# EAGLE board converter (EAGLE 7.2.0)
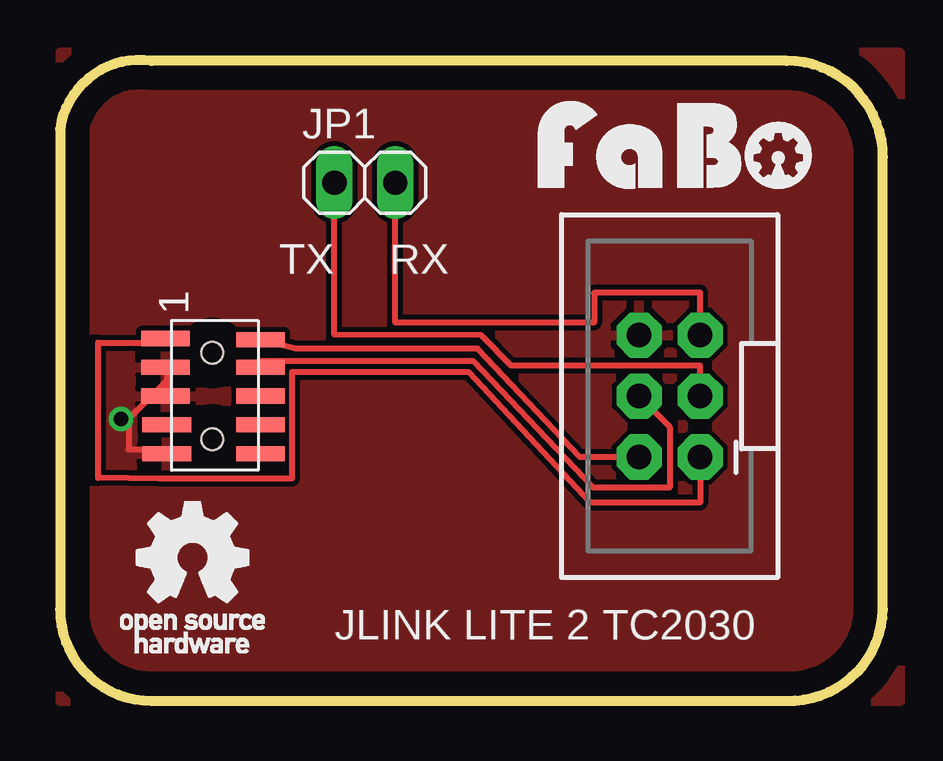
[diagram p0: board, top side]
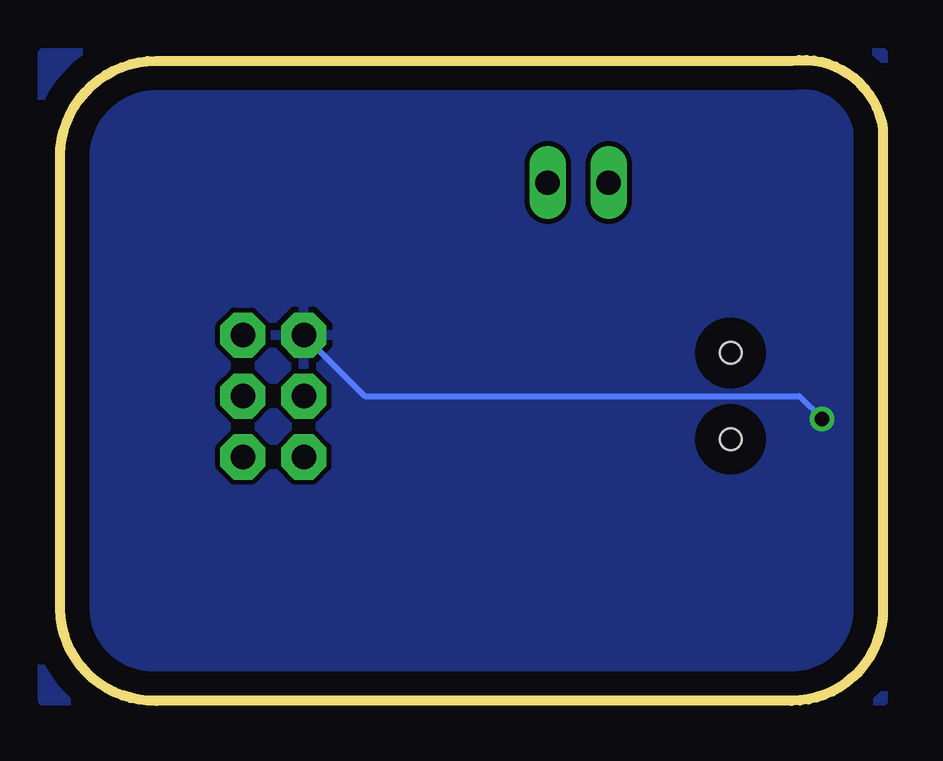
[diagram p1: board, bottom side, seen from below]

Size 34.29 x 26.7 mm. Coordinates in mm from the lower left corner, seen from the top.
Outline: 30.27,26.67 3.81,26.67 arc90 0,23.83 0,3.81 arc90 3.81,0 30.27,0 arc90 34.29,3.81 34.29,22.65 arc90 30.27,26.67
Copper layers (1*16): Top 0.035mm / dielectric 1.5mm / Bottom 0.035mm
Design rules "default": minimum track width 10mil, minimum drill 24mil, track to track 8mil, track to pad 8mil, pad to pad 8mil, via to via 8mil, smd to smd 8mil, copper to edge 40mil, drill to drill 8mil, minimum pad ring 10mil, minimum via ring 8mil, stop-mask expansion 4mil, vias tented up to drill 0mil, thermal gap 10mil

## Footprints (pad centres in the part's own frame; a part is rotated, then mirrored left to right if it is on the bottom)
1X02 = drill 1.016 long: 1 -1.27,0; 2 1.27,0
2X3-SHROUDED = drill 1.016 pad 1.88 octagon: 1 -1.27,2.54; 2 1.27,2.54; 3 -1.27,0; 4 1.27,0; 5 -1.27,-2.54; 6 1.27,-2.54
PIN-HEADER-SMT(1.27MM)2X5 = smd 0.635 x 2.032: 1 -2.4,-1.95; 2 -2.35,2; 3 -1.2,-1.95; 4 -1.2,2; 5 0,-1.95; 6 0,2; 7 1.2,-1.9; 8 1.2,2; 9 2.4,-1.9; 10 2.4,2 | hole 0.9: 1.8,0; -1.8,0

## Placement (x,y rotation side)
JP1  [1X02]  12.7,21.59 0 top
JP2  [2X3-SHROUDED]  25.4,12.7 180 top
U$1  [LOGO_FABO_M]  25.63,21.34 0 top
U$2  [LOGO_OSHW_T_M]  5.53,5.95 0 top
U$5  PIN-HEADER-SMT(1.27MM)2X5  [PIN-HEADER-SMT(1.27MM)2X5]  6.35,12.7 270 top

## Library data of the parts
JP1 = pinhead
JP2 = SparkFun-Connectors; PROD_ID: CONN-10681
U$1 = FaBo
U$2 U$5 = GClue

## Nets
3.3V: JP2.1 U$5.1
GND: JP2.6 U$5.3 U$5.5 U$5.9
P0_4: JP1.2 JP2.5
P0_5: JP1.1 JP2.3
RESET: U$5.10
SWCLK: JP2.4 U$5.4
SWDIO: JP2.2 U$5.2

## Tracks (layer width: path | path; a pad name or v marks a point on that pad's centre or on a via)
3.3V
  Top 0.254: JP2.1 26.67,8.26 22.09,8.26 17.03,13.7 9.66,13.7 9.66,9.26 4.13,9.26 1.59,9.29 1.59,14.92 4.13,14.92 U$5.1
GND  (via drill 0.61)
  Top 0.254: 4.45,13.34 4.45,13.65 U$5.3 | 4.45,13.34 4.45,12.7 U$5.5 | 2.86,11.75 2.86,10.48 4.45,10.48 U$5.9 | 4.45,13.34 2.86,11.75 | v2.54,11.75 2.86,11.75
  Bottom 0.254: v2.54,11.75 3.49,12.7 21.59,12.7 JP2.6
  pour Top: 0,0 35,0 35,27 0,27
  pour Bottom: 0,0 35,0 35,27 0,27
P0_4
  Top 0.254: JP1.2 13.97,15.76 22.25,15.76 22.25,17 26.67,17.01 JP2.5
P0_5
  Top 0.254: JP1.1 11.43,15.26 17.55,15.24 18.8,13.97 26.67,13.97 JP2.3
SWCLK
  Top 0.254: JP2.4 25.4,11.43 25.4,8.89 22.23,8.89 17.21,14.15 8.32,14.15 U$5.4
SWDIO
  Top 0.254: JP2.2 21.66,10.16 17.39,14.67 9.82,14.67 U$5.2

## Text on the board
tPlace: TX | RX | JLINK LITE 2 TC2030